# Allegro board DOEON_PCBv2_backup.brd
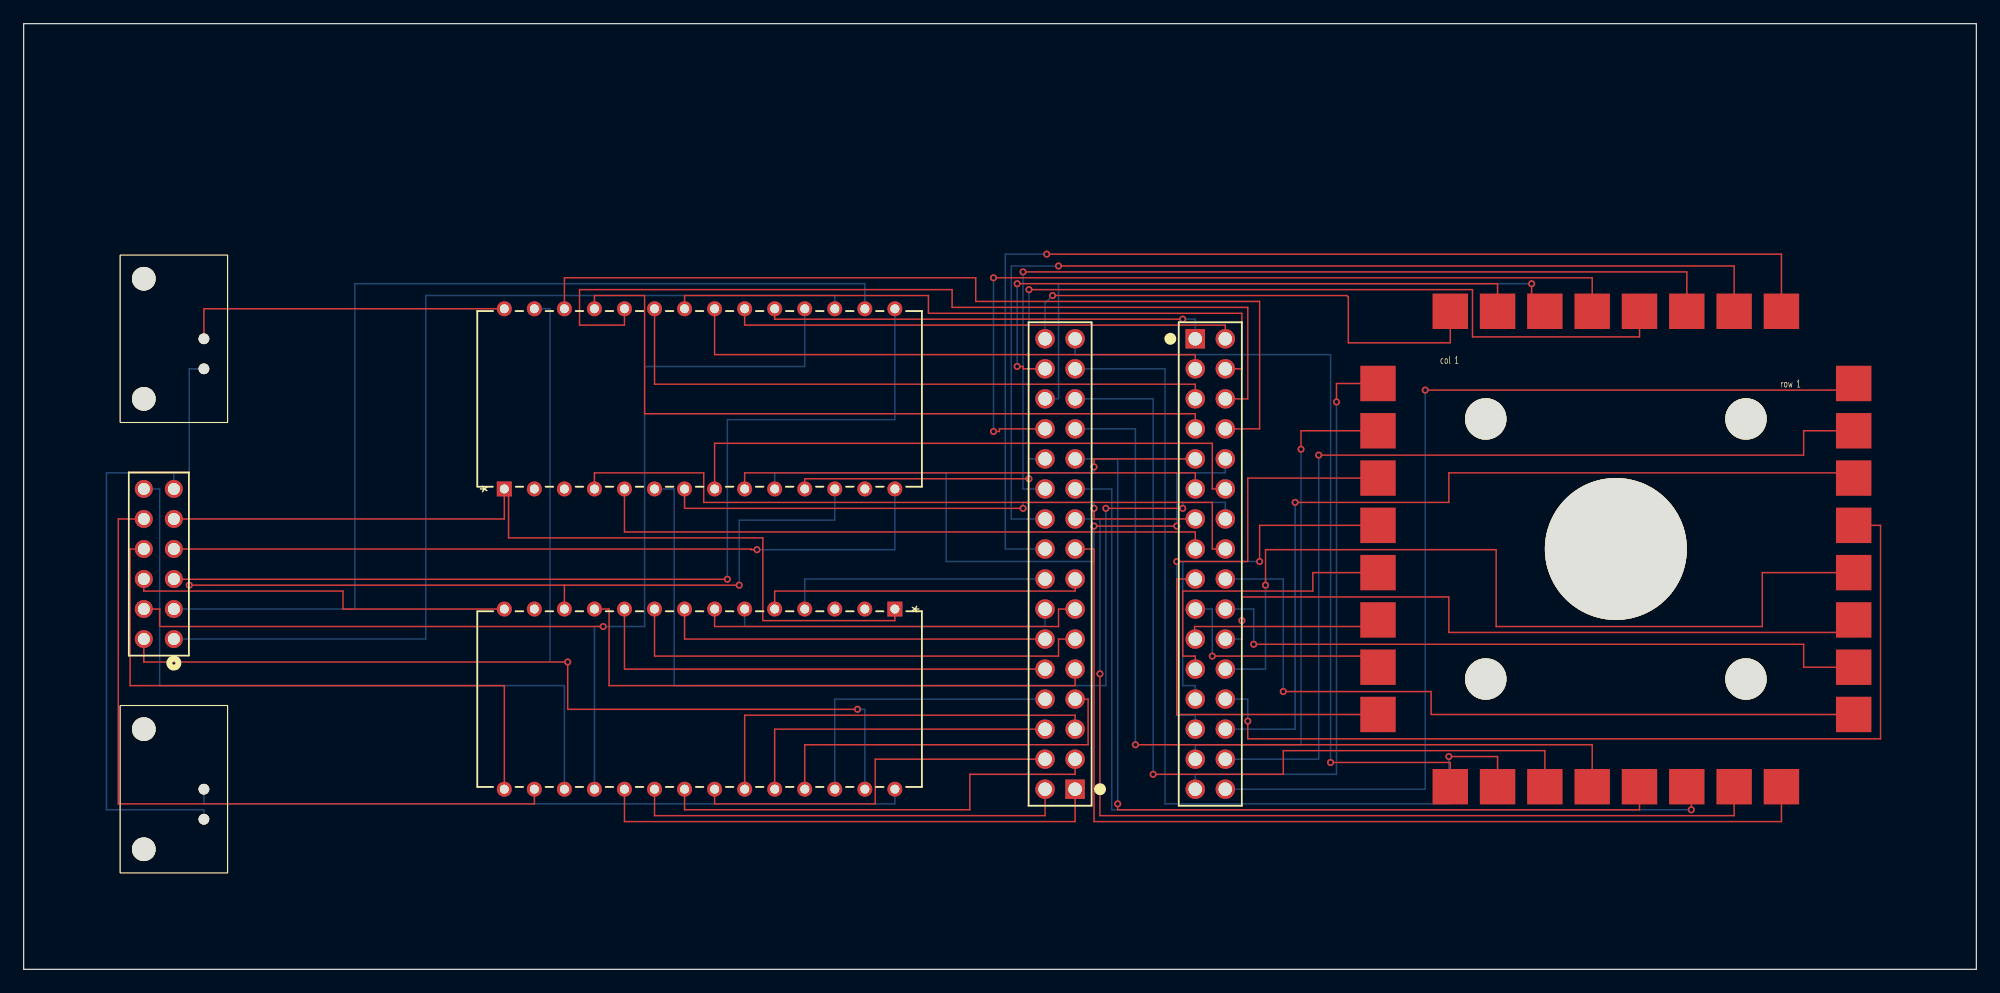
[diagram p0: board, top side]
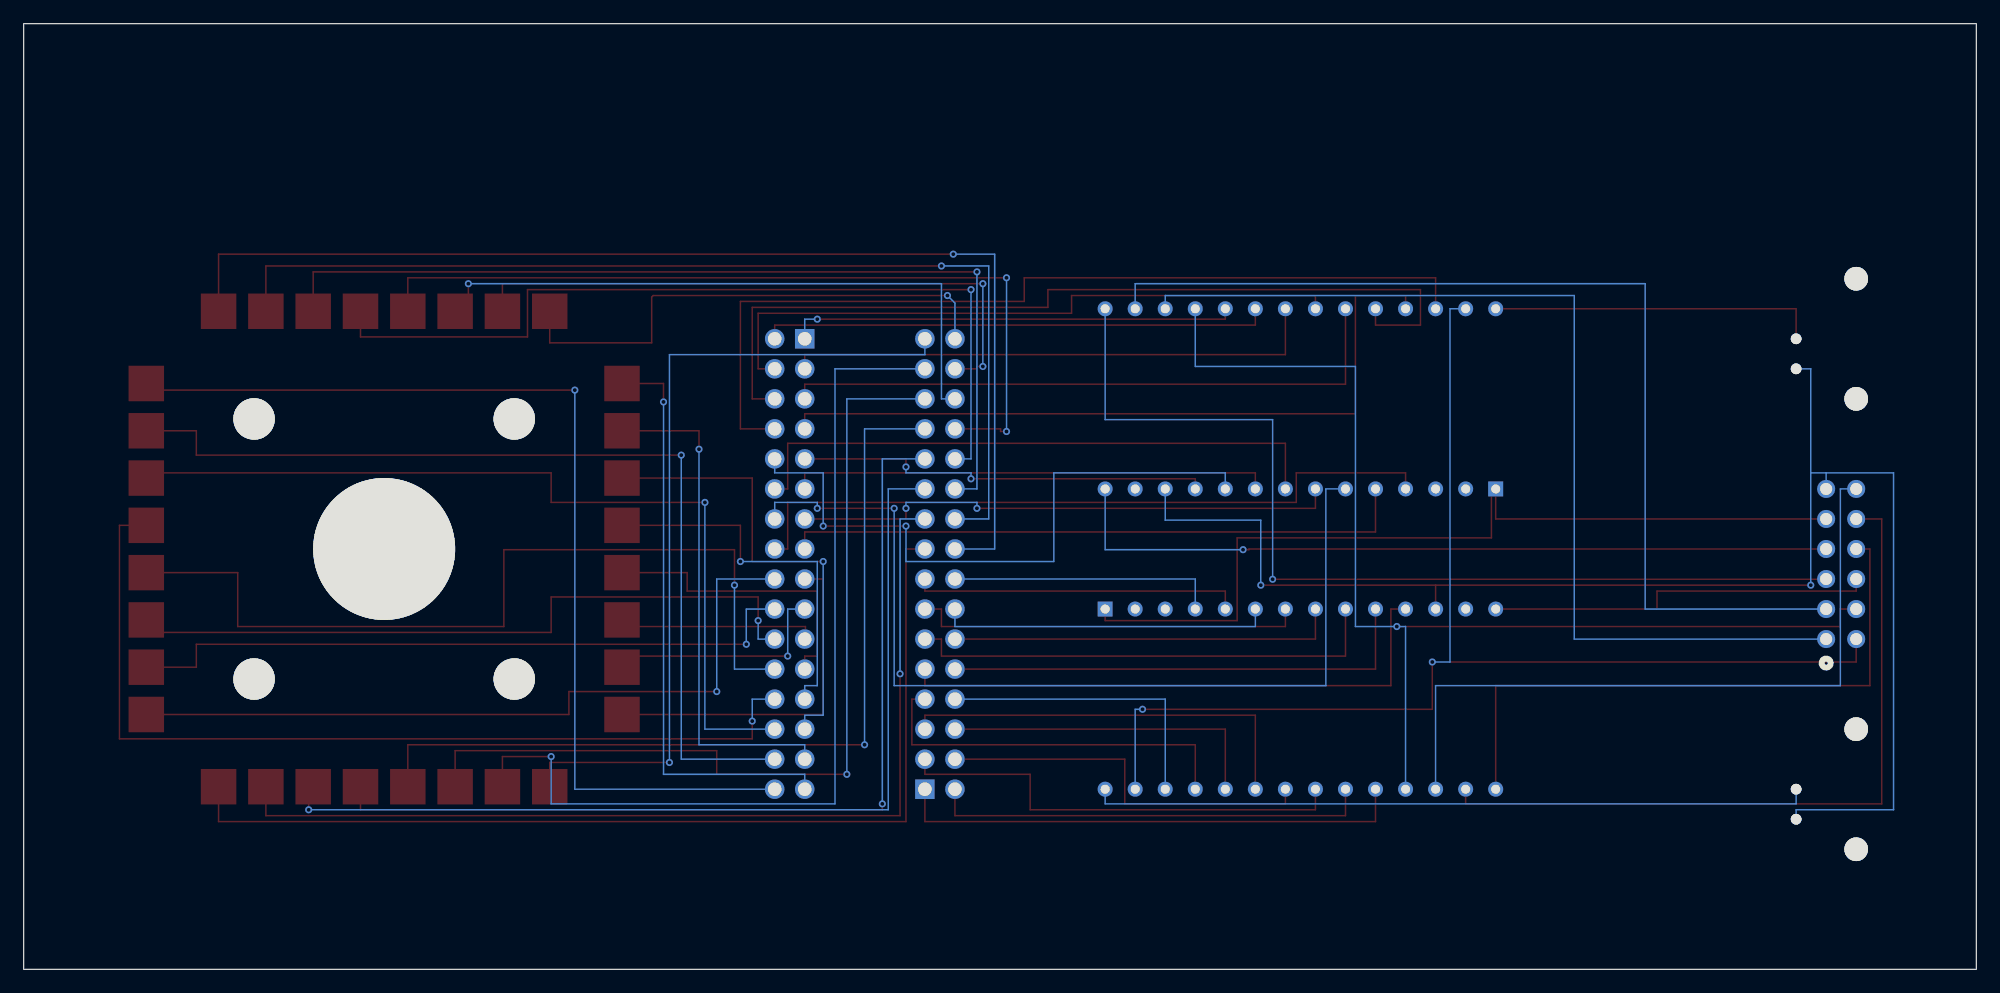
[diagram p1: board, bottom side, seen from below]

Outline 165.1 x 80 mm; copper layers: TOP, BOTTOM. Coordinates in mm from the lower left corner of the outline.
Outline path: rectangle 0,0 165.1,80

## Design rules (mm)
constraint set DEFAULT: min track width 0.127

## Placement (name value [footprint] x y rotation side)
J1  67997-212HLF  [12PINS]  12.7 27.94 90 top
J2  -  [TSW-116-07-G-D]  99.06 53.34 270 top
J3  -  [TSW-116-07-G-D]  88.9 15.24 90 top
SAMPLE1  sample_holder  [SAMPLE_MOUNT]  134.62 35.56 0 top
U1  MAX396EPI  [21-0044B_28]  40.64 40.64 90 top
U2  MAX396EPI  [21-0044B_28]  73.66 30.48 270 top
VBI1  VBI211  [BNC_YB]  10.16 58.42 90 top
VBI2  VBI211  [BNC_YB]  10.16 20.32 90 top

## Library data of the parts
J1 = 67997-212HLF: User Part Number: PN; Tolerance: TOL
J2 J3 = TSW-116-07-G-D: User Part Number: PN; Tolerance: TOL
SAMPLE1 = sample_holder
U1 U2 = MAX396EPI: User Part Number: PN; Tolerance: TOL
VBI1 VBI2 = VBI211

## Footprints (pads in the part's own frame, mm; a bottom-side part is the same pattern mirrored in y, then rotated)
12PINS
  round 1.524 hole 1.016: A1(0,0) A2(2.54,0) A3(5.08,0) A4(7.62,0) A5(10.16,0) A6(12.7,0) B1(0,2.54) B2(2.54,2.54) B3(5.08,2.54) B4(7.62,2.54) B5(10.16,2.54) B6(12.7,2.54)
21-0044B_28
  rect 1.27x1.27 hole 0.762: 1(0,0)
  round 1.27 hole 0.762: 2(0,-2.54) 3(0,-5.08) 4(0,-7.62) 5(0,-10.16) 6(0,-12.7) 7(0,-15.24) 8(0,-17.78) 9(0,-20.32) 10(0,-22.86) 11(0,-25.4) 12(0,-27.94) 13(0,-30.48) 14(0,-33.02) 15(15.24,-33.02) 16(15.24,-30.48) 17(15.24,-27.94) 18(15.24,-25.4) 19(15.24,-22.86) 20(15.24,-20.32) 21(15.24,-17.78) 22(15.24,-15.24) 23(15.24,-12.7) 24(15.24,-10.16) 25(15.24,-7.62) 26(15.24,-5.08) 27(15.24,-2.54) 28(15.24,0)
BNC_YB
  round 0.9 hole 0.9: 1(-7.62,-5.08) 2(-5.08,-5.08)
  round 2 hole 2: 3(-10.16,0) 4(0,0)
SAMPLE_MOUNT
  rect 3x3 smd: 1(20.11,14) 2(-20.11,14) 3(20.11,10) 4(-20.11,10) 5(20.11,6) 6(-20.11,6) 7(20.11,2) 8(-20.11,2) 9(20.11,-2) 10(-20.11,-2) 11(20.11,-6) 12(-20.11,-6) 13(20.11,-10) 14(-20.11,-10) 15(20.11,-14) 16(-20.11,-14) 17(-14,20.11) 18(-14,-20.11) 19(-10,20.11) 20(-10,-20.11) 21(-6,20.11) 22(-6,-20.11) 23(-2,20.11) 24(-2,-20.11) 25(2,20.11) 26(2,-20.11) 27(6,20.11) 28(6,-20.11) 29(10,20.11) 30(10,-20.11) 31(14,20.11) 32(14,-20.11)
  round 3.5 hole 3.5: 33(-11,11) 34(11,11) 35(-11,-11) 36(11,-11)
  round 12 hole 12: 37(0,0)
TSW-116-07-G-D
  rect 1.651x1.651 hole 1.143: 1(0,0)
  round 1.651 hole 1.143: 2(0,2.54) 3(2.54,0) 4(2.54,2.54) 5(5.08,0) 6(5.08,2.54) 7(7.62,0) 8(7.62,2.54) 9(10.16,0) 10(10.16,2.54) 11(12.7,0) 12(12.7,2.54) 13(15.24,0) 14(15.24,2.54) 15(17.78,0) 16(17.78,2.54) 17(20.32,0) 18(20.32,2.54) 19(22.86,0) 20(22.86,2.54) 21(25.4,0) 22(25.4,2.54) 23(27.94,0) 24(27.94,2.54) 25(30.48,0) 26(30.48,2.54) 27(33.02,0) 28(33.02,2.54) 29(35.56,0) 30(35.56,2.54) 31(38.1,0) 32(38.1,2.54)

## Nets
GND: J1.A6 U1.12 U2.12 VBI1.1 VBI2.1
COL_1: J3.1 U2.19
COL_2: J3.2 U2.20
COL_3: J3.3 U2.21
COL_4: J3.4 U2.22
COL_5: J3.5 U2.23
COL_6: J3.6 U2.24
COL_7: J3.7 U2.25
COL_8: J3.8 U2.26
COL_9: J3.9 U2.11
COL_10: J3.10 U2.10
COL_11: J3.11 U2.9
COL_12: J3.12 U2.8
COL_13: J3.13 U2.7
COL_14: J3.14 U2.6
COL_15: J3.15 U2.5
COL_16: J3.16 U2.4
COL_A0: J1.B6 U2.17
COL_A1: J1.B5 U2.16
COL_A2: J1.B4 U2.15
COL_A3: J1.B3 U2.14
EN: J1.B2 U1.18 U2.18
H_COL1: J3.32 SAMPLE1.17
H_COL2: J3.31 SAMPLE1.18
H_COL3: J3.30 SAMPLE1.19
H_COL4: J3.29 SAMPLE1.20
H_COL5: J3.28 SAMPLE1.21
H_COL6: J3.27 SAMPLE1.22
H_COL7: J3.26 SAMPLE1.23
H_COL8: J3.25 SAMPLE1.24
H_COL9: J3.24 SAMPLE1.25
H_COL10: J3.23 SAMPLE1.26
H_COL11: J3.22 SAMPLE1.27
H_COL12: J3.21 SAMPLE1.28
H_COL13: J3.20 SAMPLE1.29
H_COL14: J3.19 SAMPLE1.30
H_COL15: J3.18 SAMPLE1.31
H_COL16: J3.17 SAMPLE1.32
H_ROW1: J2.32 SAMPLE1.1
H_ROW2: J2.31 SAMPLE1.2
H_ROW3: J2.30 SAMPLE1.3
H_ROW4: J2.29 SAMPLE1.4
H_ROW5: J2.28 SAMPLE1.5
H_ROW6: J2.27 SAMPLE1.6
H_ROW7: J2.26 SAMPLE1.7
H_ROW8: J2.25 SAMPLE1.8
H_ROW9: J2.24 SAMPLE1.9
H_ROW10: J2.23 SAMPLE1.10
H_ROW11: J2.22 SAMPLE1.11
H_ROW12: J2.21 SAMPLE1.12
H_ROW13: J2.20 SAMPLE1.13
H_ROW14: J2.19 SAMPLE1.14
H_ROW15: J2.18 SAMPLE1.15
H_ROW16: J2.17 SAMPLE1.16
PULSE_IN: U1.28 VBI1.2(I_O)
PULSE_OUT: U2.28 VBI2.2(I_O)
ROW_1: J2.1 U1.19
ROW_2: J2.2 U1.20
ROW_3: J2.3 U1.21
ROW_4: J2.4 U1.22
ROW_5: J2.5 U1.23
ROW_6: J2.6 U1.24
ROW_7: J2.7 U1.25
ROW_8: J2.8 U1.26
ROW_9: J2.9 U1.11
ROW_10: J2.10 U1.10
ROW_11: J2.11 U1.9
ROW_12: J2.12 U1.8
ROW_13: J2.13 U1.7
ROW_14: J2.14 U1.6
ROW_15: J2.15 U1.5
ROW_16: J2.16 U1.4
ROW_A0: J1.A1 U1.17
ROW_A1: J1.A2 U1.16
ROW_A2: J1.A3 U1.15
ROW_A3: J1.A4 U1.14
V+: J1.A5 U1.1 U2.1
V-: J1.B1 U1.27(V-) U2.27(V-)

Pads without a net: SAMPLE1 33 34 35 36 37; U1 2 3 13; U2 2 3 13; VBI1 3 4; VBI2 3 4

## Via types
v1: diameter 0.61, hole 0.33, TOP to BOTTOM, 46 vias

## Routing (per net, layer and track width the routed paths; a pad name or vN(x,y) marks a point on that pad's centre or on a via; arc(x,y) is an arc through that point)
GND: length 130.2
  TOP w0.127: 45.72,32.5 v1(14,32.5) ; 45.72,32.5 U2.12 ; 45.72,32.5 v1(60.5,32.5)
  BOTTOM w0.127: 12.7,42 7,42 7,13.5 15.24,13.5 VBI2.1 ; 12.7,42 14,42 ; 12.7,42 J1.A6 ; VBI1.1 14,50.8 14,42 ; U1.12 68.58,38 60.5,38 v1(60.5,32.5) ; 14,42 v1(14,32.5)
COL_1: length 43.6
  TOP w0.127: J3.1 88.9,12.5 50.8,12.5 U2.19
COL_2: length 37.5
  TOP w0.127: U2.20 53.34,13 86.36,13 J3.2
COL_3: length 39
  TOP w0.127: U2.21 55.88,13.5 80,13.5 80,16.5 88.9,16.5 J3.3
COL_4: length 33
  TOP w0.127: J3.4 72,17.78 72,14 58.42,14 U2.22
COL_5: length 35.4
  TOP w0.127: U2.23 60.96,21.5 88.9,21.5 J3.5
COL_6: length 27.9
  TOP w0.127: U2.24 63.5,20.32 J3.6
COL_7: length 32.7
  TOP w0.127: U2.25 66.04,19 90,19 90,22.86 J3.7
COL_8: length 25.4
  BOTTOM w0.127: J3.8 68.58,22.86 U2.26
COL_9: length 48.5
  TOP w0.127: U2.11 49.5,30.48 49.5,24 88.9,24 J3.9
COL_10: length 40.6
  TOP w0.127: U2.10 50.8,25.4 J3.10
COL_11: length 41
  TOP w0.127: U2.9 53.34,26.5 87.5,26.5 87.5,27.94 J3.11
COL_12: length 33
  TOP w0.127: U2.8 55.88,27.94 J3.12
COL_13: length 33.4
  TOP w0.127: U2.7 58.42,29 87.5,29 87.5,30.48 J3.13
COL_14: length 28.4
  BOTTOM w0.127: J3.14 86.36,29 60.96,29 U2.6
COL_15: length 27.9
  TOP w0.127: U2.5 63.5,32 88.9,32 J3.15
COL_16: length 22.9
  BOTTOM w0.127: J3.16 66.04,33.02 U2.4
COL_A0: length 61
  BOTTOM w0.127: J1.B6 11.5,40.64 11.5,24 45.72,24 U2.17
COL_A1: length 62.7
  TOP w0.127: J1.B5 8,38.1 8,14 43.18,14 U2.16
COL_A2: length 53.1
  TOP w0.127: J1.B4 9,35.56 9,24 40.64,24 U2.15
COL_A3: length 33
  TOP w0.127: U2.14 27,30.48 27,32 10.16,32 J1.B3
EN: length 98.7
  TOP w0.127: v1(49,29) 11.5,29 11.5,30.48 J1.B2
  BOTTOM w0.127: U1.18 66.04,51 52.5,51 52.5,29 v1(49,29) 48.26,29 U2.18
H_COL1: length 44.1
  TOP w0.127: SAMPLE1.17 120.62,53 112,53 112,56.87 111.87,57 v1(87,57)
  BOTTOM w0.127: v1(87,57) 86.36,56.37 J3.32
H_COL2: length 69.6
  TOP w0.127: SAMPLE1.18 120.62,17.5 v1(110.5,17.5)
  BOTTOM w0.127: v1(110.5,17.5) 110.5,52 88.9,52 J3.31
H_COL3: length 52.5
  TOP w0.127: SAMPLE1.19 124.62,58 v1(84,58) ; J3.30 84.5,50.8 84.5,51 v1(84,51)
  BOTTOM w0.127: v1(84,58) v1(84,51)
H_COL4: length 79.1
  TOP w0.127: SAMPLE1.20 124.62,18 v1(120.5,18)
  BOTTOM w0.127: J3.29 96.5,50.8 96.5,14 120.5,14 v1(120.5,18)
H_COL5: length 54.3
  TOP w0.127: SAMPLE1.21 127.5,55.67 v1(127.5,58)
  BOTTOM w0.127: J3.28 87.5,48.26 87.5,58 v1(127.5,58)
H_COL6: length 76.5
  TOP w0.127: v1(95.5,16.5) 106.5,16.5 106.5,18.5 128.62,18.5 SAMPLE1.22
  BOTTOM w0.127: v1(95.5,16.5) 95.5,48.26 J3.27
H_COL7: length 71
  TOP w0.127: SAMPLE1.23 132.62,58.5 v1(82,58.5) ; v1(82,45.5) 82.5,45.5 82.5,45.72 J3.26
  BOTTOM w0.127: v1(82,58.5) v1(82,45.5)
H_COL8: length 74
  TOP w0.127: SAMPLE1.24 132.62,19 v1(94,19)
  BOTTOM w0.127: J3.25 94,45.72 v1(94,19)
H_COL9: length 73.5
  TOP w0.127: v1(85,57.5) 122.5,57.5 122.5,53.5 136.62,53.5 SAMPLE1.25
  BOTTOM w0.127: v1(85,57.5) 85,43.18 J3.24
H_COL10: length 79.3
  TOP w0.127: v1(92.5,14) 92.5,13.5 136.62,13.5 SAMPLE1.26
  BOTTOM w0.127: v1(92.5,14) 92.5,43.18 J3.23
H_COL11: length 79.7
  TOP w0.127: v1(84.5,59) 140.62,59 SAMPLE1.27
  BOTTOM w0.127: v1(84.5,59) 84.5,40.64 J3.22
H_COL12: length 81.6
  TOP w0.127: v1(141,13.5) 141,15.45 SAMPLE1.28
  BOTTOM w0.127: v1(141,13.5) 92,13.5 92,40.64 J3.21
H_COL13: length 89.2
  TOP w0.127: SAMPLE1.29 144.62,59.5 v1(87.5,59.5)
  BOTTOM w0.127: v1(87.5,59.5) 83.5,59.5 83.5,38.1 J3.20
H_COL14: length 83.3
  TOP w0.127: SAMPLE1.30 144.62,13 91,13 v1(91,25)
  BOTTOM w0.127: J3.19 91,38.1 v1(91,25)
H_COL15: length 98.8
  TOP w0.127: v1(86.5,60.5) 148.62,60.5 SAMPLE1.31
  BOTTOM w0.127: J3.18 83,35.56 83,60.5 v1(86.5,60.5)
H_COL16: length 85.7
  TOP w0.127: J3.17 90.5,35.56 90.5,12.5 148.62,12.5 SAMPLE1.32
H_ROW1: length 87.4
  TOP w0.127: v1(118.5,49) 154.73,49 SAMPLE1.1
  BOTTOM w0.127: v1(118.5,49) 118.5,15.24 J2.32
H_ROW2: length 49.8
  TOP w0.127: v1(111,48) 111,49.56 SAMPLE1.2
  BOTTOM w0.127: v1(111,48) 111,16.5 99.06,16.5 J2.31
H_ROW3: length 80.9
  TOP w0.127: v1(109.5,43.5) 150.5,43.5 150.5,45.56 SAMPLE1.3
  BOTTOM w0.127: v1(109.5,43.5) 109.5,17.78 J2.30
H_ROW4: length 43.2
  TOP w0.127: v1(108,44) 108,45.56 SAMPLE1.4
  BOTTOM w0.127: J2.29 99.06,19 108,19 v1(108,44)
H_ROW5: length 75.2
  TOP w0.127: SAMPLE1.5 154.73,42 120.5,42 120.5,39.5 v1(107.5,39.5)
  BOTTOM w0.127: J2.28 107.5,20.32 v1(107.5,39.5)
H_ROW6: length 39.8
  TOP w0.127: SAMPLE1.6 103.5,41.56 103.5,34.5 v1(97.5,34.5)
  BOTTOM w0.127: v1(97.5,34.5) 97.5,21.5 99.06,21.5 J2.27
H_ROW7: length 79.1
  TOP w0.127: SAMPLE1.7 157,37.56 157,19.5 103.5,19.5 v1(103.5,21)
  BOTTOM w0.127: v1(103.5,21) 103.5,22.86 J2.26
H_ROW8: length 32.3
  TOP w0.127: v1(104.5,34.5) 104.5,37.56 SAMPLE1.8
  BOTTOM w0.127: J2.25 99.06,24 98,24 98,34.5 v1(104.5,34.5)
H_ROW9: length 74.3
  TOP w0.127: v1(105,32.5) 105,35.5 124.5,35.5 124.5,29 147,29 147,33.56 SAMPLE1.9
  BOTTOM w0.127: v1(105,32.5) 105,25.4 J2.24
H_ROW10: length 25.7
  TOP w0.127: SAMPLE1.10 109,33.56 109,32 98,32 98,26.5 99.06,26.5 J2.23
H_ROW11: length 60.8
  TOP w0.127: v1(103,29.5) 103,31.5 120.5,31.5 120.5,28.5 154.73,28.5 SAMPLE1.11
  BOTTOM w0.127: v1(103,29.5) 103,27.94 J2.22
H_ROW12: length 17.2
  TOP w0.127: J2.21 99,27.94 99,29 114.51,29 SAMPLE1.12
H_ROW13: length 58
  TOP w0.127: v1(104,27.5) 150.5,27.5 150.5,25.56 SAMPLE1.13
  BOTTOM w0.127: J2.20 104,30.48 v1(104,27.5)
H_ROW14: length 20.4
  TOP w0.127: SAMPLE1.14 114.51,26.5 v1(100.5,26.5)
  BOTTOM w0.127: J2.19 100.5,30.48 v1(100.5,26.5)
H_ROW15: length 64.6
  TOP w0.127: v1(106.5,23.5) 119,23.5 119,21.56 SAMPLE1.15
  BOTTOM w0.127: J2.18 106.5,33.02 v1(106.5,23.5)
H_ROW16: length 30
  TOP w0.127: J2.17 97.5,33.02 97.5,21.56 SAMPLE1.16
PULSE_IN: length 27.9
  TOP w0.127: U1.28 15.24,55.88 VBI1.2
PULSE_OUT: length 60.9
  BOTTOM w0.127: U2.28 73.66,14 15.24,14 VBI2.2
ROW_1: length 38.1
  TOP w0.127: v1(98,55) 63.5,55 U1.19
  BOTTOM w0.127: J2.1 99.06,55 v1(98,55)
ROW_2: length 43.2
  TOP w0.127: J2.2 101.6,54.5 60.96,54.5 U1.20
ROW_3: length 45.7
  TOP w0.127: U1.21 58.42,52 99.06,52 J2.3
ROW_4: length 55.8
  TOP w0.127: J2.4 103,50.8 103,55.5 76.5,55.5 76.5,57 55.88,57 U1.22
ROW_5: length 53.3
  TOP w0.127: J2.5 99.06,49.5 53.34,49.5 U1.23
ROW_6: length 75.8
  TOP w0.127: U1.24 50.8,54.5 47,54.5 47,57.5 78.5,57.5 78.5,56 103.5,56 103.5,48.26 J2.6
ROW_7: length 63.2
  TOP w0.127: J2.7 99.06,47 52.5,47 52.5,57 48.26,57 U1.25
ROW_8: length 77.1
  TOP w0.127: J2.8 104.5,45.72 104.5,56.5 80.5,56.5 80.5,58.5 45.72,58.5 U1.26
ROW_9: length 35.6
  TOP w0.127: v1(85,41.5) 66.04,41.5 U1.11 ; J2.9 90.5,43.18 v1(90.5,42.5)
  BOTTOM w0.127: v1(90.5,42.5) 90.5,42 85,42 v1(85,41.5)
ROW_10: length 55.6
  TOP w0.127: v1(97.5,37.5) v1(90.5,37.5)
  BOTTOM w0.127: U1.10 63.5,42 78,42 78,34.5 90.5,34.5 v1(90.5,37.5) ; J2.10 101.6,42 97.5,42 v1(97.5,37.5)
ROW_11: length 40.8
  TOP w0.127: U1.9 60.96,42 99.06,42 J2.11
ROW_12: length 50.9
  TOP w0.127: U1.8 58.42,44.5 100.5,44.5 100.5,40.64 J2.12
ROW_13: length 46.7
  TOP w0.127: J2.13 90.5,38.1 v1(90.5,39) ; v1(84.5,39) 55.88,39 U1.7
  BOTTOM w0.127: v1(90.5,39) 90.5,39.5 84.5,39.5 v1(84.5,39)
ROW_14: length 81.8
  TOP w0.127: v1(98,39) v1(91.5,39)
  BOTTOM w0.127: v1(98,39) 98,39.5 101.6,39.5 J2.14 ; v1(91.5,39) 91.5,24 55,24 55,40.64 U1.6
ROW_15: length 53.3
  TOP w0.127: U1.5 50.8,37 99.06,37 J2.15
ROW_16: length 61.1
  TOP w0.127: J2.16 100.5,35.56 100.5,39.5 57.5,39.5 57.5,42 48.26,42 U1.4
ROW_A0: length 86.1
  BOTTOM w0.127: J1.A1 34,27.94 34,57 68.58,57 U1.17
ROW_A1: length 88.1
  BOTTOM w0.127: U1.16 71.12,58 28,58 28,30.48 J1.A2
ROW_A2: length 83.9
  TOP w0.127: v1(59.5,33) 12.7,33 J1.A3
  BOTTOM w0.127: U1.15 73.66,46.5 59.5,46.5 v1(59.5,33)
ROW_A3: length 66.2
  TOP w0.127: v1(62,35.5) 61.5,35.5 61.5,35.56 J1.A4
  BOTTOM w0.127: v1(62,35.5) 73.66,35.5 U1.14
V+: length 75.6
  TOP w0.127: U2.1 73.66,29.5 62.5,29.5 62.5,36.5 41,36.5 41,40.64 U1.1 40.64,38.1 J1.A5
V-: length 106.4
  TOP w0.127: J1.B1 10.16,26 v1(46,26) 46,22 v1(70.5,22)
  BOTTOM w0.127: v1(46,26) 44.5,26 44.5,55.88 U1.27 ; U2.27 71.12,22 v1(70.5,22)
